# EAGLE board 04B-060-A1-01 (EAGLE 9.6.2)
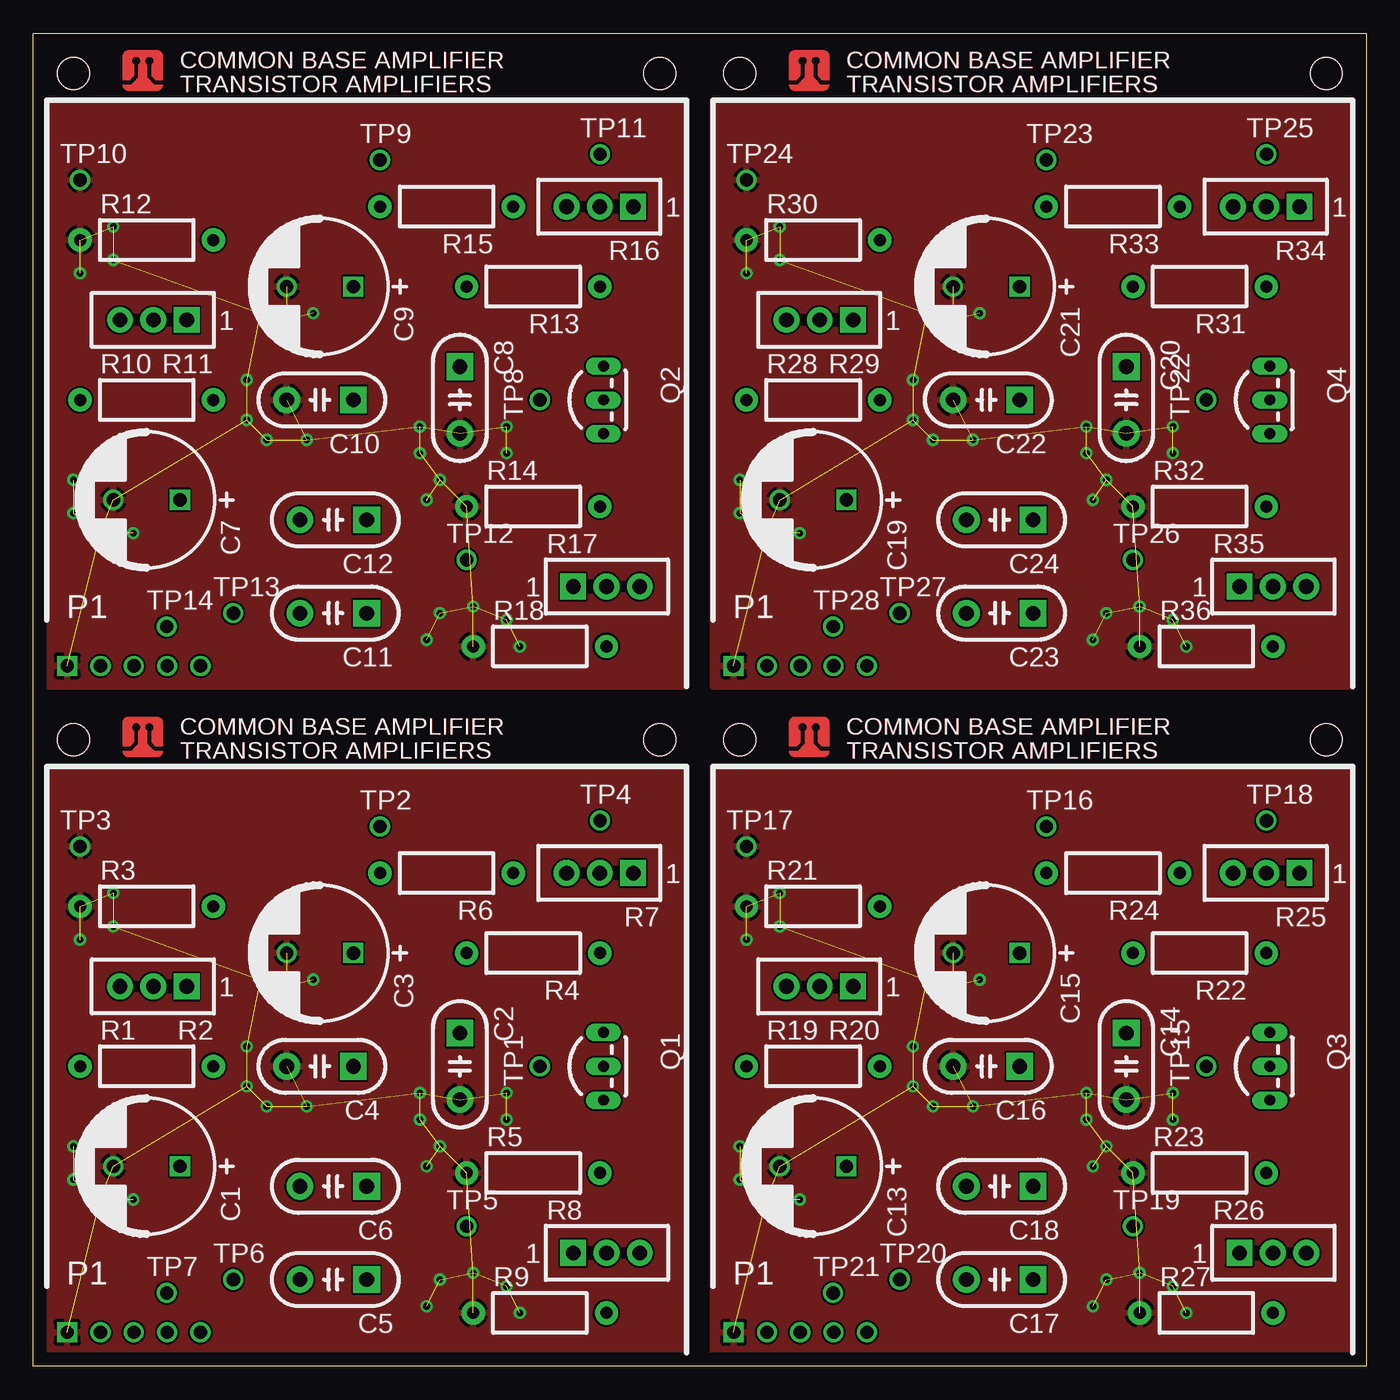
[diagram p0: board, top side]
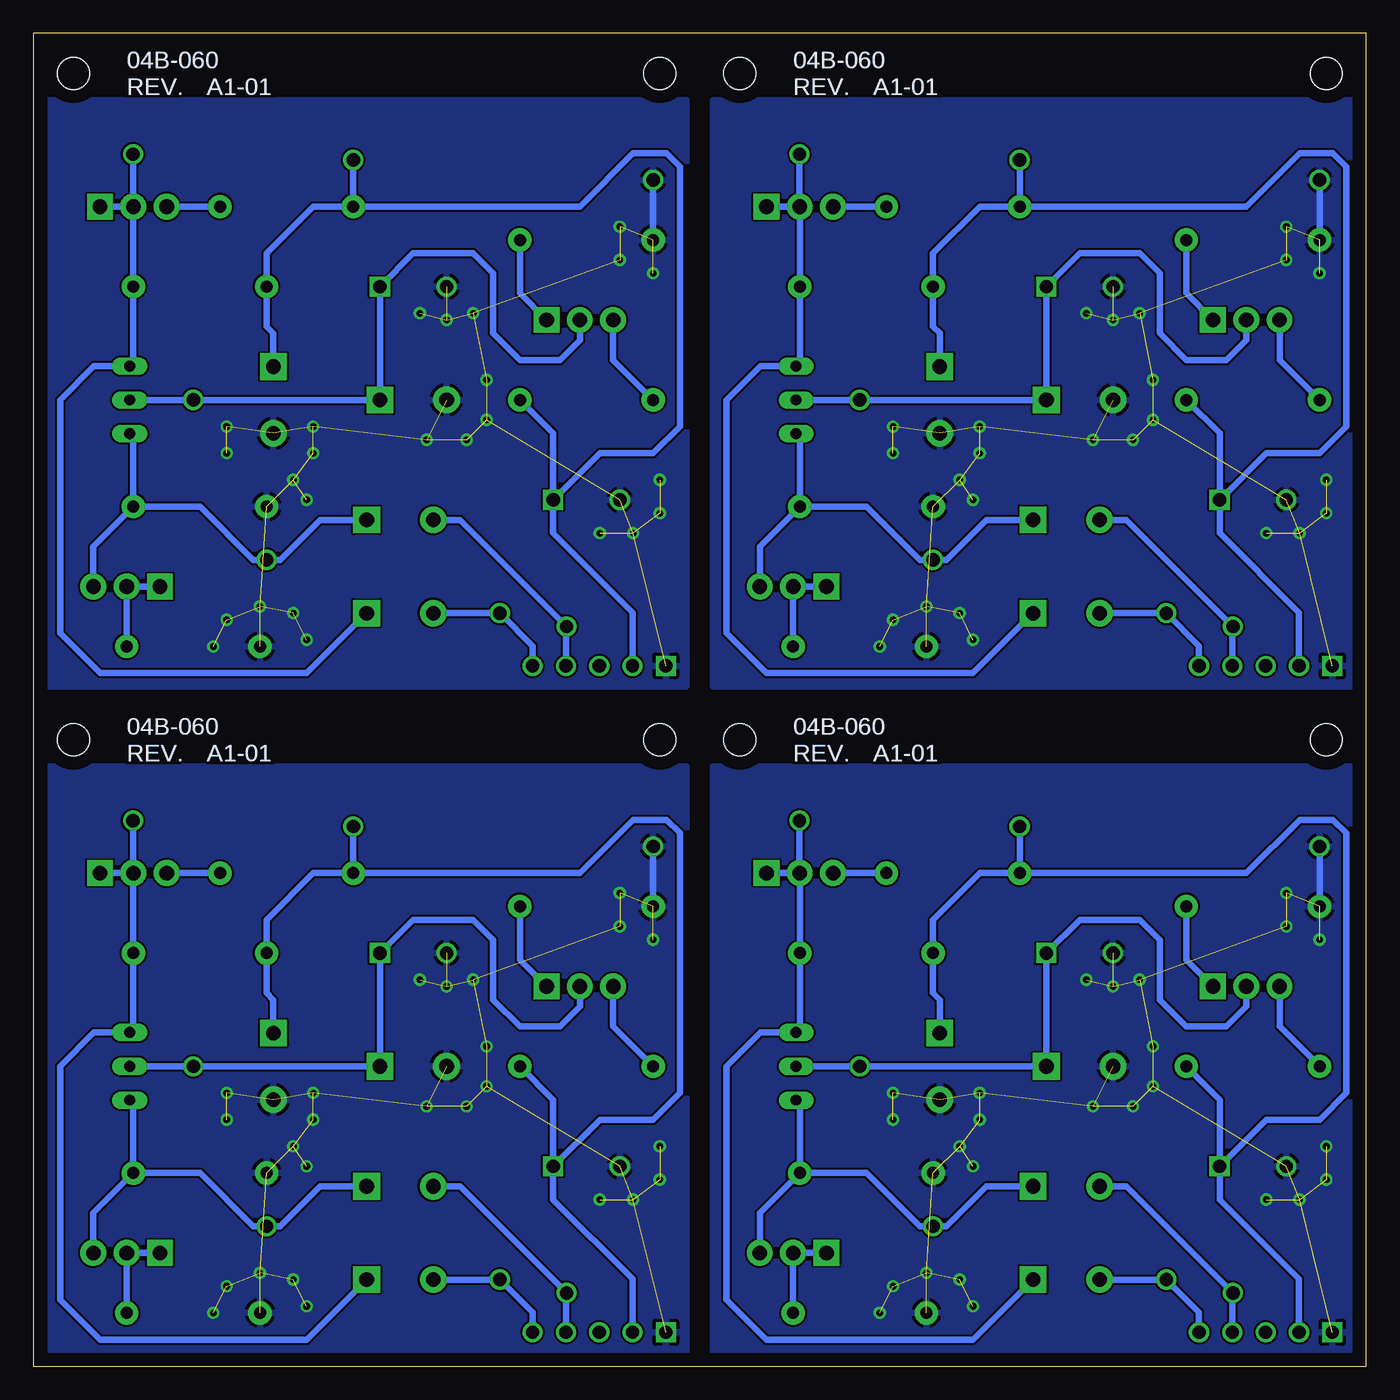
[diagram p1: board, bottom side, seen from below]

Size 100 x 100 mm. Coordinates in mm from the lower left corner, seen from the top.
Outline: 0,0 0,100 100,100 100,0 0,0
Copper layers (1*16): Top 0.035mm / dielectric 1.5mm / Bottom 0.035mm
Design rules "default": minimum track width 6mil, minimum drill 0.35mm, track to track 6mil, track to pad 6mil, pad to pad 6mil, via to via 6mil, smd to smd 6mil, copper to edge 40mil, drill to drill 6mil, minimum pad ring 10mil, minimum via ring 8mil, stop-mask expansion 4mil, vias tented up to drill 0mil, thermal gap 10mil

## Footprints (pad centres in the part's own frame; a part is rotated, then mirrored left to right if it is on the bottom)
C5MM = drill 1 square: + -2.5,0 | drill 1: - 2.5,0
C050-024X044 = drill 1.1 pad 2 square: 1 -2.5,0 | drill 1.1 pad 2: 2 2.5,0
PINS_1X5 = drill 1 square: 1 0,0 | drill 1: 2 2.5,0; 3 5,0; 4 7.5,0; 5 10,0
MINIPCB_0P_50X50MM = hole 2.4: 47,47; 3,47
TO92-EBC-OVAL = drill 0.813 long: B 0,-1.27; C 2.54,-1.27; E -2.54,-1.27
0204/10 = drill 0.9 pad 1.75: 1 -5,0; 2 5,0
TRIM_0100 = drill 1.1 pad 1.93 square: 1 0,0 | drill 1.1 pad 1.93: 2 2.5,0; 3 5,0
PINS_1_TESTPOINT_KE5000_NOTEXT = drill 1: 1 0,0

## Placement (x,y rotation side)
C1  [C5MM]  8.5,15 180 top
C2  [C050-024X044]  32,22.5 270 top
C3  [C5MM]  21.5,31 180 top
C4  [C050-024X044]  21.5,22.5 180 top
C5  [C050-024X044]  22.5,6.5 180 top
C6  [C050-024X044]  22.5,13.5 180 top
C7  [C5MM]  8.5,65 180 top
C8  [C050-024X044]  32,72.5 270 top
C9  [C5MM]  21.5,81 180 top
C10  [C050-024X044]  21.5,72.5 180 top
C11  [C050-024X044]  22.5,56.5 180 top
C12  [C050-024X044]  22.5,63.5 180 top
C13  [C5MM]  58.5,15 180 top
C14  [C050-024X044]  82,22.5 270 top
C15  [C5MM]  71.5,31 180 top
C16  [C050-024X044]  71.5,22.5 180 top
C17  [C050-024X044]  72.5,6.5 180 top
C18  [C050-024X044]  72.5,13.5 180 top
C19  [C5MM]  58.5,65 180 top
C20  [C050-024X044]  82,72.5 270 top
C21  [C5MM]  71.5,81 180 top
C22  [C050-024X044]  71.5,72.5 180 top
C23  [C050-024X044]  72.5,56.5 180 top
C24  [C050-024X044]  72.5,63.5 180 top
P1  [PINS_1X5]  2.54,2.54 0 top
P2  [PINS_1X5]  2.54,52.54 0 top
P3  [PINS_1X5]  52.54,2.54 0 top
P4  [PINS_1X5]  52.54,52.54 0 top
PCB1  [MINIPCB_0P_50X50MM]  0,0 0 top
PCB2  [MINIPCB_0P_50X50MM]  0,50 0 top
PCB3  [MINIPCB_0P_50X50MM]  50,0 0 top
PCB4  [MINIPCB_0P_50X50MM]  50,50 0 top
Q1  NPN  [TO92-EBC-OVAL]  41.5,22.5 90 top
Q2  NPN  [TO92-EBC-OVAL]  41.5,72.5 90 top
Q3  NPN  [TO92-EBC-OVAL]  91.5,22.5 90 top
Q4  NPN  [TO92-EBC-OVAL]  91.5,72.5 90 top
R1  [0204/10]  8.5,22.5 0 top
R2  [TRIM_0100]  11.5,28.5 180 top
R3  [0204/10]  8.5,34.5 0 top
R4  [0204/10]  37.5,31 180 top
R5  [0204/10]  37.5,14.5 0 top
R6  [0204/10]  31,37 180 top
R7  [TRIM_0100]  45,37 180 top
R8  [TRIM_0100]  40.5,8.5 0 top
R9  [0204/10]  38,4 0 top
R10  [0204/10]  8.5,72.5 0 top
R11  [TRIM_0100]  11.5,78.5 180 top
R12  [0204/10]  8.5,84.5 0 top
R13  [0204/10]  37.5,81 180 top
R14  [0204/10]  37.5,64.5 0 top
R15  [0204/10]  31,87 180 top
R16  [TRIM_0100]  45,87 180 top
R17  [TRIM_0100]  40.5,58.5 0 top
R18  [0204/10]  38,54 0 top
R19  [0204/10]  58.5,22.5 0 top
R20  [TRIM_0100]  61.5,28.5 180 top
R21  [0204/10]  58.5,34.5 0 top
R22  [0204/10]  87.5,31 180 top
R23  [0204/10]  87.5,14.5 0 top
R24  [0204/10]  81,37 180 top
R25  [TRIM_0100]  95,37 180 top
R26  [TRIM_0100]  90.5,8.5 0 top
R27  [0204/10]  88,4 0 top
R28  [0204/10]  58.5,72.5 0 top
R29  [TRIM_0100]  61.5,78.5 180 top
R30  [0204/10]  58.5,84.5 0 top
R31  [0204/10]  87.5,81 180 top
R32  [0204/10]  87.5,64.5 0 top
R33  [0204/10]  81,87 180 top
R34  [TRIM_0100]  95,87 180 top
R35  [TRIM_0100]  90.5,58.5 0 top
R36  [0204/10]  88,54 0 top
TP1  [PINS_1_TESTPOINT_KE5000_NOTEXT]  38,22.5 90 top
TP2  [PINS_1_TESTPOINT_KE5000_NOTEXT]  26,40.5 0 top
TP3  [PINS_1_TESTPOINT_KE5000_NOTEXT]  3.5,39 0 top
TP4  [PINS_1_TESTPOINT_KE5000_NOTEXT]  42.52,40.93 0 top
TP5  [PINS_1_TESTPOINT_KE5000_NOTEXT]  32.5,10.5 0 top
TP6  [PINS_1_TESTPOINT_KE5000_NOTEXT]  15,6.5 0 top
TP7  [PINS_1_TESTPOINT_KE5000_NOTEXT]  10,5.5 0 top
TP8  [PINS_1_TESTPOINT_KE5000_NOTEXT]  38,72.5 90 top
TP9  [PINS_1_TESTPOINT_KE5000_NOTEXT]  26,90.5 0 top
TP10  [PINS_1_TESTPOINT_KE5000_NOTEXT]  3.5,89 0 top
TP11  [PINS_1_TESTPOINT_KE5000_NOTEXT]  42.52,90.93 0 top
TP12  [PINS_1_TESTPOINT_KE5000_NOTEXT]  32.5,60.5 0 top
TP13  [PINS_1_TESTPOINT_KE5000_NOTEXT]  15,56.5 0 top
TP14  [PINS_1_TESTPOINT_KE5000_NOTEXT]  10,55.5 0 top
TP15  [PINS_1_TESTPOINT_KE5000_NOTEXT]  88,22.5 90 top
TP16  [PINS_1_TESTPOINT_KE5000_NOTEXT]  76,40.5 0 top
TP17  [PINS_1_TESTPOINT_KE5000_NOTEXT]  53.5,39 0 top
TP18  [PINS_1_TESTPOINT_KE5000_NOTEXT]  92.52,40.93 0 top
TP19  [PINS_1_TESTPOINT_KE5000_NOTEXT]  82.5,10.5 0 top
TP20  [PINS_1_TESTPOINT_KE5000_NOTEXT]  65,6.5 0 top
TP21  [PINS_1_TESTPOINT_KE5000_NOTEXT]  60,5.5 0 top
TP22  [PINS_1_TESTPOINT_KE5000_NOTEXT]  88,72.5 90 top
TP23  [PINS_1_TESTPOINT_KE5000_NOTEXT]  76,90.5 0 top
TP24  [PINS_1_TESTPOINT_KE5000_NOTEXT]  53.5,89 0 top
TP25  [PINS_1_TESTPOINT_KE5000_NOTEXT]  92.52,90.93 0 top
TP26  [PINS_1_TESTPOINT_KE5000_NOTEXT]  82.5,60.5 0 top
TP27  [PINS_1_TESTPOINT_KE5000_NOTEXT]  65,56.5 0 top
TP28  [PINS_1_TESTPOINT_KE5000_NOTEXT]  60,55.5 0 top

## Library data of the parts
C1-C24 P1-P4 Q1-Q4 R1-R36 TP1-TP28 = minipcb
PCB1-PCB4 = minipcb; CIRCUIT_CATEGORY: TRANSISTOR AMPLIFIERS; PART_NUMBER: 04B-060; REVISION: A1-01; TITLE: COMMON BASE AMPLIFIER

## Nets
BASE: C3.+ C4.1 Q1.B R2.2 TP1.1
BASE1: C9.+ C10.1 Q2.B R11.2 TP8.1
BASE2: C15.+ C16.1 Q3.B R20.2 TP15.1
BASE3: C21.+ C22.1 Q4.B R29.2 TP22.1
COLLECTOR: C5.1 Q1.C R4.1 R7.1 R7.2 TP4.1
COLLECTOR1: C11.1 Q2.C R13.1 R16.1 R16.2 TP11.1
COLLECTOR2: C17.1 Q3.C R22.1 R25.1 R25.2 TP18.1
COLLECTOR3: C23.1 Q4.C R31.1 R34.1 R34.2 TP25.1
EMITTER: C6.1 Q1.E R5.2 R8.3 TP5.1
EMITTER1: C12.1 Q2.E R14.2 R17.3 TP12.1
EMITTER2: C18.1 Q3.E R23.2 R26.3 TP19.1
EMITTER3: C24.1 Q4.E R32.2 R35.3 TP26.1
GND: C1.- C2.2 C3.- C4.2 P1.1 R3.1 R5.1 R9.1 TP3.1
GND1: C7.- C8.2 C9.- C10.2 P2.1 R12.1 R14.1 R18.1 TP10.1
GND2: C13.- C14.2 C15.- C16.2 P3.1 R21.1 R23.1 R27.1 TP17.1
GND3: C19.- C20.2 C21.- C22.2 P4.1 R30.1 R32.1 R36.1 TP24.1
INPUT: C6.2 P1.4 TP7.1
INPUT1: C12.2 P2.4 TP14.1
INPUT2: C18.2 P3.4 TP21.1
INPUT3: C24.2 P4.4 TP28.1
N$1: R2.1 R3.2
N$2: R1.1 R2.3
N$3: R8.1 R8.2 R9.2
N$4: R6.1 R7.3
N$5: R11.1 R12.2
N$6: R10.1 R11.3
N$7: R15.1 R16.3
N$8: R17.1 R17.2 R18.2
N$9: R20.1 R21.2
N$10: R19.1 R20.3
N$11: R24.1 R25.3
N$12: R26.1 R26.2 R27.2
N$13: R29.1 R30.2
N$14: R28.1 R29.3
N$15: R33.1 R34.3
N$16: R35.1 R35.2 R36.2
OUTPUT: C5.2 P1.5 TP6.1
OUTPUT1: C11.2 P2.5 TP13.1
OUTPUT2: C17.2 P3.5 TP20.1
OUTPUT3: C23.2 P4.5 TP27.1
V+: C1.+ C2.1 P1.2 R1.2 R4.2 R6.2 TP2.1
V+1: C7.+ C8.1 P2.2 R10.2 R13.2 R15.2 TP9.1
V+2: C13.+ C14.1 P3.2 R19.2 R22.2 R24.2 TP16.1
V+3: C19.+ C20.1 P4.2 R28.2 R31.2 R33.2 TP23.1

## Tracks (layer width: path | path; a pad name or v marks a point on that pad's centre or on a via)
BASE
  Bottom 0.5: R2.2 9,27 10.5,25.5 13.5,25.5 15.5,27.5 15.5,32 17,33.5 21.5,33.5 C3.+ C4.1 TP1.1 Q1.B
BASE1
  Bottom 0.5: R11.2 9,77 10.5,75.5 13.5,75.5 15.5,77.5 15.5,82 17,83.5 21.5,83.5 C9.+ C10.1 TP8.1 Q2.B
BASE2
  Bottom 0.5: R20.2 59,27 60.5,25.5 63.5,25.5 65.5,27.5 65.5,32 67,33.5 71.5,33.5 C15.+ C16.1 TP15.1 Q3.B
BASE3
  Bottom 0.5: R29.2 59,77 60.5,75.5 63.5,75.5 65.5,77.5 65.5,82 67,83.5 71.5,83.5 C21.+ C22.1 TP22.1 Q4.B
COLLECTOR
  Bottom 0.5: R7.1 R7.2 | R7.2 R4.1 42.5,25.31 Q1.C 45.46,25.04 48,22.5 48,5 45,2 29.5,2 C5.1 | TP4.1 42.52,37.02 R7.2
COLLECTOR1
  Bottom 0.5: R16.1 R16.2 | R16.2 R13.1 42.5,75.31 Q2.C 45.46,75.04 48,72.5 48,55 45,52 29.5,52 C11.1 | TP11.1 42.52,87.02 R16.2
COLLECTOR2
  Bottom 0.5: R25.1 R25.2 | R25.2 R22.1 92.5,25.31 Q3.C 95.46,25.04 98,22.5 98,5 95,2 79.5,2 C17.1 | TP18.1 92.52,37.02 R25.2
COLLECTOR3
  Bottom 0.5: R34.1 R34.2 | R34.2 R31.1 92.5,75.31 Q4.C 95.46,75.04 98,72.5 98,55 95,52 79.5,52 C23.1 | TP25.1 92.52,87.02 R34.2
EMITTER
  Bottom 0.5: R5.2 42.5,19.69 Q1.E | R8.3 45.5,11.5 R5.2 | C6.1 28.5,13.5 31.5,10.5 TP5.1 33.5,10.5 37.5,14.5 R5.2
EMITTER1
  Bottom 0.5: R14.2 42.5,69.69 Q2.E | R17.3 45.5,61.5 R14.2 | C12.1 28.5,63.5 31.5,60.5 TP12.1 33.5,60.5 37.5,64.5 R14.2
EMITTER2
  Bottom 0.5: R23.2 92.5,19.69 Q3.E | R26.3 95.5,11.5 R23.2 | C18.1 78.5,13.5 81.5,10.5 TP19.1 83.5,10.5 87.5,14.5 R23.2
EMITTER3
  Bottom 0.5: R32.2 92.5,69.69 Q4.E | R35.3 95.5,61.5 R32.2 | C24.1 78.5,63.5 81.5,60.5 TP26.1 83.5,60.5 87.5,64.5 R32.2
GND  (via drill 0.5)  (32 unrouted)
  Bottom 0.5: R3.1 TP3.1
  other vias: 16,24 16,21 17.5,19.5 20.5,19.5 29,20.5 29,18.5 29.5,15 29.5,4.5 30.5,6.5 33,7 36.5,4 35.5,6 21,29 19,28.5 17,29 7.5,12.5 5,12.5 3,14 3,16.5 3.5,32 6,33 6,35.5 35.5,20.5 35.5,18.5 30.5,16.5
  pour Bottom: 1,1 49,1 49,45 1,45
  pour Top: 1,1 49,1 49,45 1,45
GND1  (via drill 0.5)  (32 unrouted)
  Bottom 0.5: R12.1 TP10.1
  other vias: 16,74 16,71 17.5,69.5 20.5,69.5 29,70.5 29,68.5 29.5,65 29.5,54.5 30.5,56.5 33,57 36.5,54 35.5,56 21,79 19,78.5 17,79 7.5,62.5 5,62.5 3,64 3,66.5 3.5,82 6,83 6,85.5 35.5,70.5 35.5,68.5 30.5,66.5
  pour Bottom: 1,51 49,51 49,95 1,95
  pour Top: 1,51 49,51 49,95 1,95
GND2  (via drill 0.5)  (32 unrouted)
  Bottom 0.5: R21.1 TP17.1
  other vias: 66,24 66,21 67.5,19.5 70.5,19.5 79,20.5 79,18.5 79.5,15 79.5,4.5 80.5,6.5 83,7 86.5,4 85.5,6 71,29 69,28.5 67,29 57.5,12.5 55,12.5 53,14 53,16.5 53.5,32 56,33 56,35.5 85.5,20.5 85.5,18.5 80.5,16.5
  pour Bottom: 51,1 99,1 99,45 51,45
  pour Top: 51,1 99,1 99,45 51,45
GND3  (via drill 0.5)  (32 unrouted)
  Bottom 0.5: R30.1 TP24.1
  other vias: 66,74 66,71 67.5,69.5 70.5,69.5 79,70.5 79,68.5 79.5,65 79.5,54.5 80.5,56.5 83,57 86.5,54 85.5,56 71,79 69,78.5 67,79 57.5,62.5 55,62.5 53,64 53,66.5 53.5,82 56,83 56,85.5 85.5,70.5 85.5,68.5 80.5,66.5
  pour Bottom: 51,51 99,51 99,95 51,95
  pour Top: 51,51 99,51 99,95 51,95
INPUT
  Bottom 0.5: P1.4 10.04,5.46 TP7.1 18,13.5 C6.2
INPUT1
  Bottom 0.5: P2.4 10.04,55.46 TP14.1 18,63.5 C12.2
INPUT2
  Bottom 0.5: P3.4 60.04,5.46 TP21.1 68,13.5 C18.2
INPUT3
  Bottom 0.5: P4.4 60.04,55.46 TP28.1 68,63.5 C24.2
N$1
  Bottom 0.5: R3.2 13.5,30.5 R2.1
N$2
  Bottom 0.5: R1.1 6.5,25.5 R2.3
N$3
  Bottom 0.5: R8.1 R8.2 R9.2
N$4
  Bottom 0.5: R6.1 R7.3
N$5
  Bottom 0.5: R12.2 13.5,80.5 R11.1
N$6
  Bottom 0.5: R10.1 6.5,75.5 R11.3
N$7
  Bottom 0.5: R15.1 R16.3
N$8
  Bottom 0.5: R17.1 R17.2 R18.2
N$9
  Bottom 0.5: R21.2 63.5,30.5 R20.1
N$10
  Bottom 0.5: R19.1 56.5,25.5 R20.3
N$11
  Bottom 0.5: R24.1 R25.3
N$12
  Bottom 0.5: R26.1 R26.2 R27.2
N$13
  Bottom 0.5: R30.2 63.5,80.5 R29.1
N$14
  Bottom 0.5: R28.1 56.5,75.5 R29.3
N$15
  Bottom 0.5: R33.1 R34.3
N$16
  Bottom 0.5: R35.1 R35.2 R36.2
OUTPUT
  Bottom 0.5: P1.5 12.54,4.04 TP6.1 C5.2
OUTPUT1
  Bottom 0.5: P2.5 12.54,54.04 TP13.1 C11.2
OUTPUT2
  Bottom 0.5: P3.5 62.54,4.04 TP20.1 C17.2
OUTPUT3
  Bottom 0.5: P4.5 62.54,54.04 TP27.1 C23.2
V+
  Bottom 0.5: P1.2 5.04,6.54 11,12.5 C1.+ | C1.+ 11,20 R1.2 | C1.+ 7.5,18.5 3.5,18.5 1.5,20.5 1.5,40 2.5,41 5,41 9,37 R6.2 | R6.2 29,37 32.5,33.5 R4.2 32.5,28 32,27.5 C2.1 | TP2.1 R6.2
V+1
  Bottom 0.5: P2.2 5.04,56.54 11,62.5 C7.+ | C7.+ 11,70 R10.2 | C7.+ 7.5,68.5 3.5,68.5 1.5,70.5 1.5,90 2.5,91 5,91 9,87 R15.2 | R15.2 29,87 32.5,83.5 R13.2 32.5,78 32,77.5 C8.1 | TP9.1 R15.2
V+2
  Bottom 0.5: P3.2 55.04,6.54 61,12.5 C13.+ | C13.+ 61,20 R19.2 | C13.+ 57.5,18.5 53.5,18.5 51.5,20.5 51.5,40 52.5,41 55,41 59,37 R24.2 | R24.2 79,37 82.5,33.5 R22.2 82.5,28 82,27.5 C14.1 | TP16.1 R24.2
V+3
  Bottom 0.5: P4.2 55.04,56.54 61,62.5 C19.+ | C19.+ 61,70 R28.2 | C19.+ 57.5,68.5 53.5,68.5 51.5,70.5 51.5,90 52.5,91 55,91 59,87 R33.2 | R33.2 79,87 82.5,83.5 R31.2 82.5,78 82,77.5 C20.1 | TP23.1 R33.2